# Altium PCB STM32F103C8T6.pcbdoc
Units mm, origin at the board's own origin, x right, y up, seen from the top; angles counter-clockwise.
Board outline 22.7 x 22.7 mm, 2 copper layers (Top Layer, Bottom Layer), stack 0 mm thick; 1 components, 0 nets, 48 pads, 0 vias.
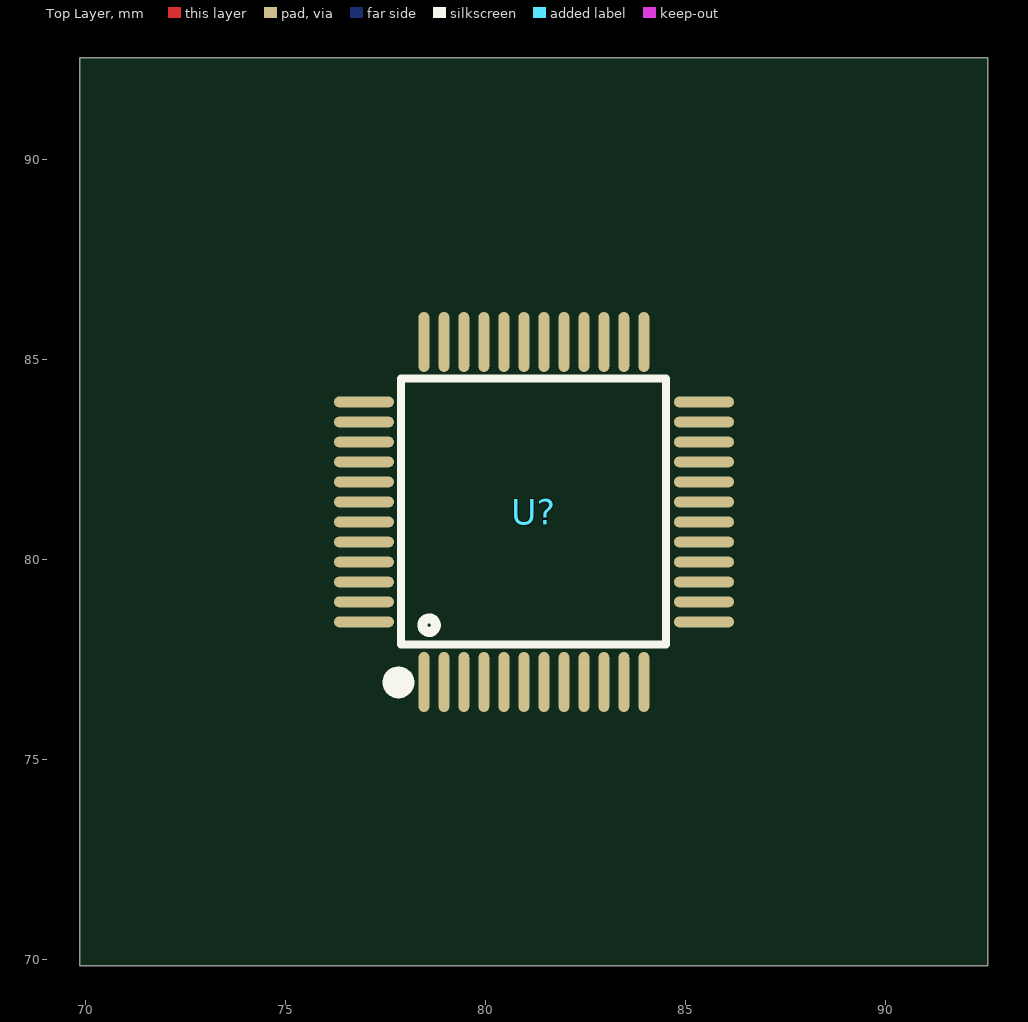
[diagram p0: Top Layer view]
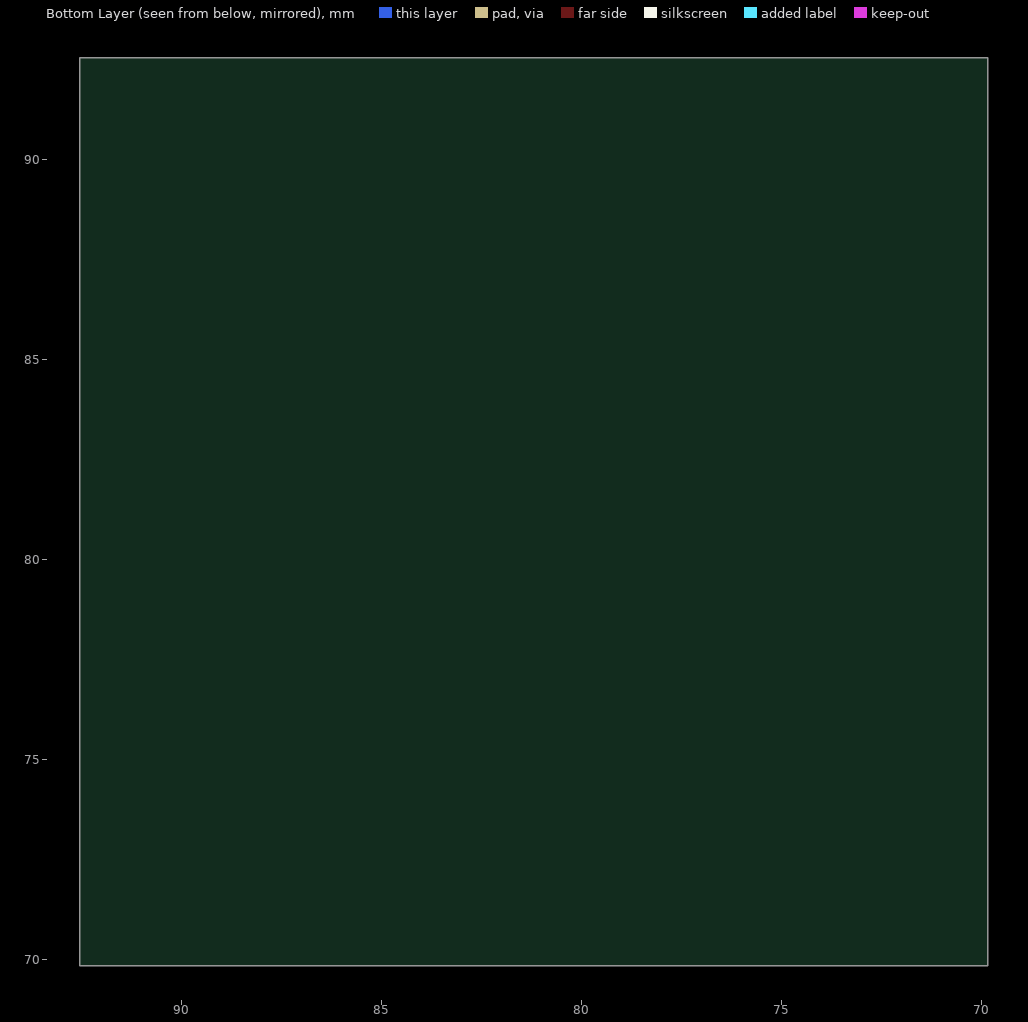
[diagram p1: Bottom Layer view, seen from below]

## Layer stack, top to bottom
Top Layer: signal copper (thickness not stored)
Bottom Layer: signal copper (thickness not stored)

## Board outline
92.55,69.85 69.85,69.85 69.85,92.55 92.55,92.55

## Components (designator, comment, footprint, x,y, rotation, side; value= is the part's Value field where it differs from the comment)
U? "STM32F103C8T6" LQFP-48_L7.0-W7.0-P0.50-LS9.0-BL 81.199,81.199 r0 top

## Footprints (in the part's own frame and the unit in brackets; to place one, negate y for a bottom-side part, rotate by r counter-clockwise, add the part's x,y. Pads: shape width x height; smd on the part's side, far side on the other; paste and mask are expansions set on the pad)
LQFP-48_L7.0-W7.0-P0.50-LS9.0-BL [mil]
  oval 10.6x59.1 smd paste+0 mask+2: 1(-108.2,-167.3) 2(-88.5,-167.3) 3(-68.9,-167.3) 4(-49.2,-167.3) 5(-29.5,-167.3) 6(-9.8,-167.3) 7(9.9,-167.3) 8(29.6,-167.3) 9(49.3,-167.3) 10(68.9,-167.3) 11(88.6,-167.3) 12(108.3,-167.3) 25(108.3,167.4) 26(88.6,167.4) 27(68.9,167.4) 28(49.3,167.4) 29(29.6,167.4) 30(9.9,167.4) 31(-9.8,167.4) 32(-29.5,167.4) 33(-49.2,167.4) 34(-68.9,167.4) 35(-88.5,167.4) 36(-108.2,167.4)
  oval 59.1x10.6 smd paste+0 mask+2: 13(167.4,-108.2) 14(167.4,-88.5) 15(167.4,-68.9) 16(167.4,-49.2) 17(167.4,-29.5) 18(167.4,-9.8) 19(167.4,9.9) 20(167.4,29.6) 21(167.4,49.3) 22(167.4,68.9) 23(167.4,88.6) 24(167.4,108.3) 37(-167.3,108.3) 38(-167.3,88.6) 39(-167.3,68.9) 40(-167.3,49.3) 41(-167.3,29.6) 42(-167.3,9.9) 43(-167.3,-9.8) 44(-167.3,-29.5) 45(-167.3,-49.2) 46(-167.3,-68.9) 47(-167.3,-88.5) 48(-167.3,-108.2)
  silkscreen extent -141,-176 130,132

## Nets (pads, with @x,y where several pads share a name; then routed paths per layer and width w, separated by ;. In a path a pad name is that pad's centre, name@x,y a point inside that pad or via, vN(x,y) a via of type N, cw(c..) or ccw(c..) an arc to the next point about the centre after c; other vN are vias at no path point)
pads on no net: U?.1 U?.2 U?.3 U?.4 U?.5 U?.6 U?.7 U?.8 U?.9 U?.10 U?.11 U?.12 U?.13 U?.14 U?.15 U?.16 U?.17 U?.18 U?.19 U?.20 U?.21 U?.22 U?.23 U?.24 U?.25 U?.26 U?.27 U?.28 U?.29 U?.30 U?.31 U?.32 U?.33 U?.34 U?.35 U?.36 U?.37 U?.38 U?.39 U?.40 U?.41 U?.42 U?.43 U?.44 U?.45 U?.46 U?.47 U?.48